# EAGLE board nixie (EAGLE 6.4)
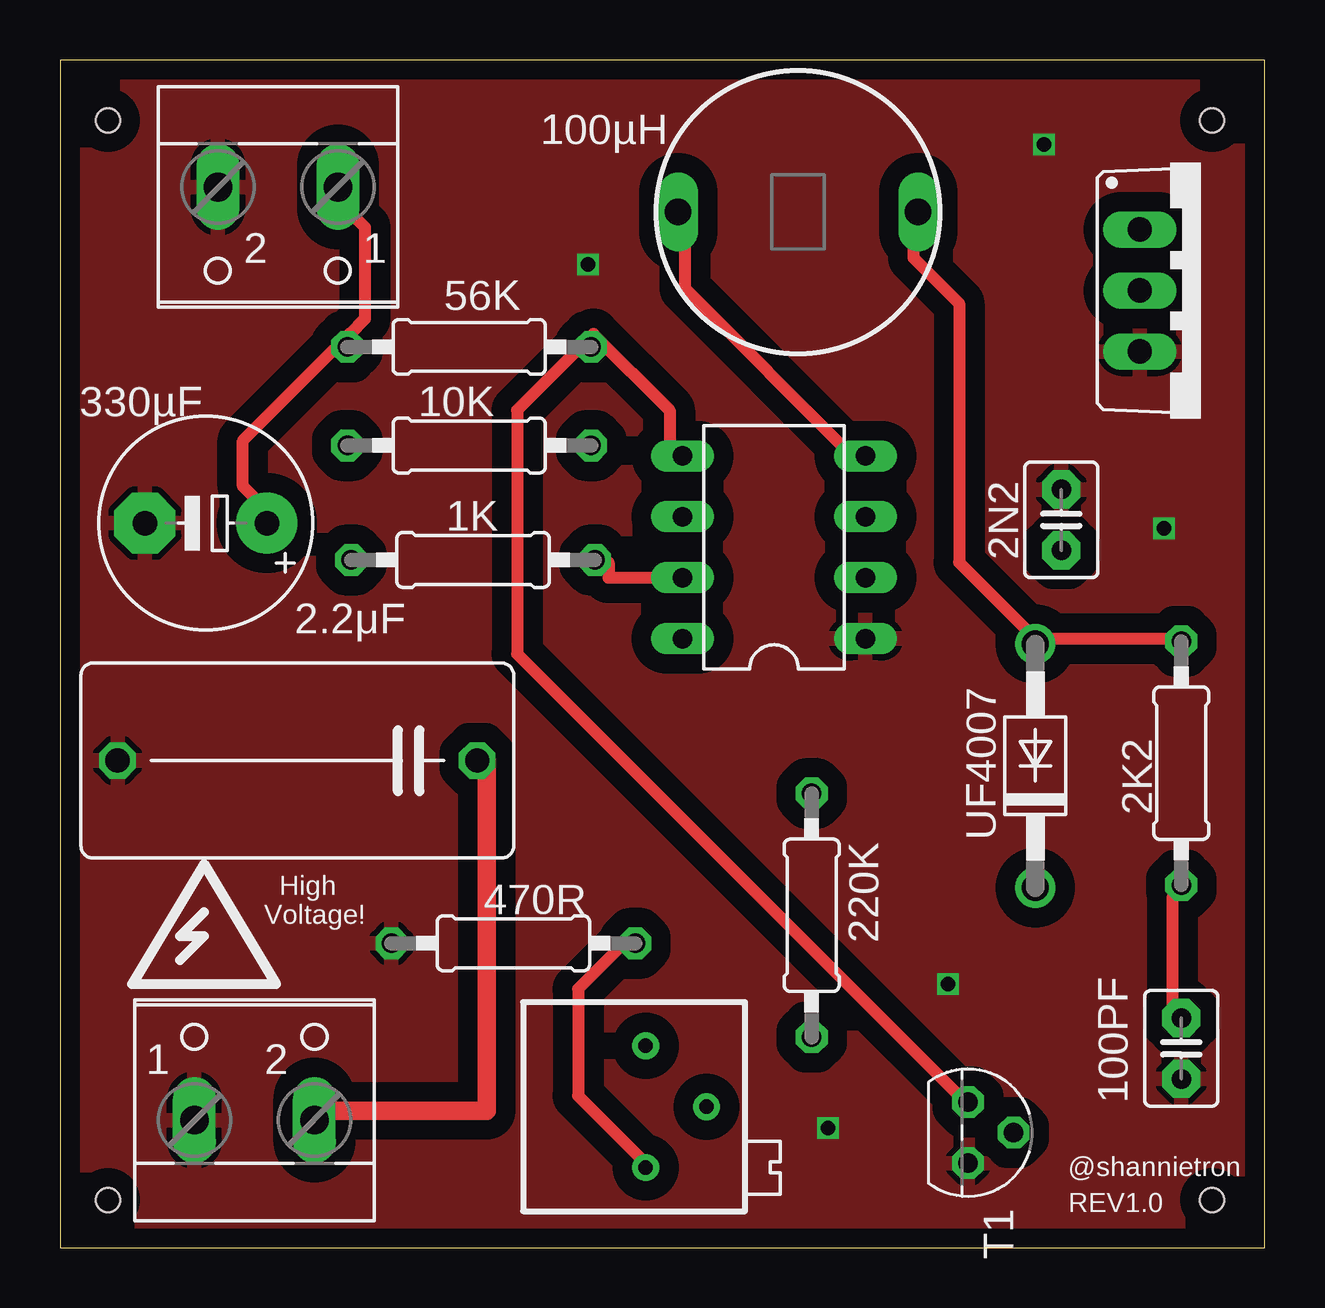
[diagram p0: board, top side]
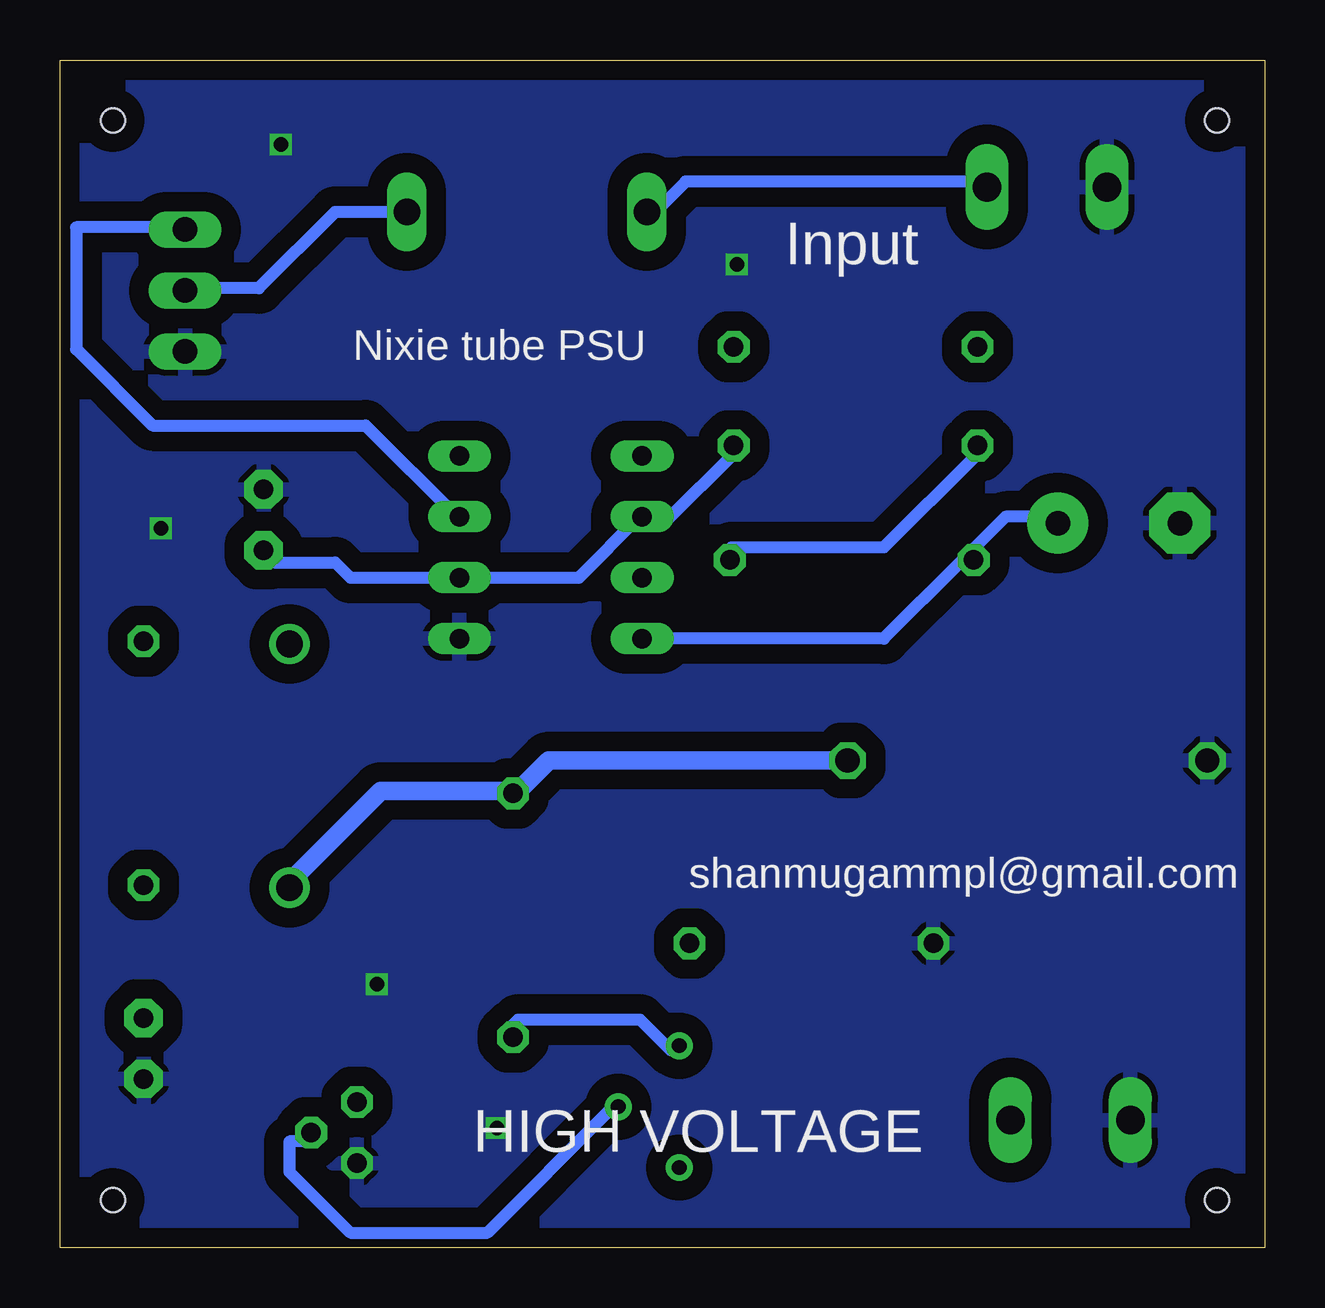
[diagram p1: board, bottom side, seen from below]

Size 50.2 x 49.52 mm. Coordinates in mm from the lower left corner, seen from the top.
Outline: 0,0 50.2,0 50.2,49.52 0,49.52 0,0
Copper layers (1*16): Top 0.035mm / dielectric 1.5mm / Bottom 0.035mm
Design rules "Fusion_eagle_rule_v1.1": minimum track width 6mil, minimum drill 12mil, track to track 6mil, track to pad 6mil, pad to pad 6mil, via to via 6mil, smd to smd 0mil, copper to edge 10mil, drill to drill 10mil, minimum pad ring 10mil, minimum via ring 6mil, stop-mask expansion 2mil, vias tented up to drill 100mil, thermal gap 10mil
Net classes: 0 default: width 0.508 mm, drill 0.508 mm, clearance 0.254 mm; 1 HV: width 0.762 mm, drill 0.635 mm, clearance 2.032 mm; 2 L: width 0.508 mm, drill 0.635 mm, clearance 1.016 mm
Holes 1 mm at 2,47 2,2 48,2 48,47

## Footprints (pad centres in the part's own frame; a part is rotated, then mirrored left to right if it is on the bottom)
0207/10 = drill 0.813 octagon: 1 -5.08,0; 2 5.08,0
C150-084X183 = drill 1.016 octagon: 1 -7.493,0; 2 7.493,0
C2.5-3 = drill 0.813 pad 1.6 octagon: 1 -1.27,0; 2 1.27,0
E5-8,5 = drill 1.016 pad 2.54: + -2.54,0 | drill 1.016 pad 2.54 octagon: - 2.54,0
DO41-10 = drill 1.118: A 5.08,0; C -5.08,0
DIL-08 = drill 0.813 long: 1 -3.81,-3.81; 2 -1.27,-3.81; 3 1.27,-3.81; 4 3.81,-3.81; 5 3.81,3.81; 6 1.27,3.81; 7 -1.27,3.81; 8 -3.81,3.81
SD12-680 = drill 1.1 long: 1 -5,0; 2 5,0
TO220BV = drill 1.016 long: D 0,-2.54; G -2.54,-2.54; S 2.54,-2.54
RTRIM3296P = drill 0.61: 1 0,-2.54; 2 2.54,0; 3 0,2.54
TO92 = drill 0.813 octagon: 1 1.27,0; 2 0,1.905; 3 -1.27,0
W237-102 = drill 1.194 long: 1 -2.5,-1.27; 2 2.5,-1.27

## Placement (x,y rotation side)
1K  [0207/10]  17.21,28.68 180 top
2.2μF  [C150-084X183]  9.89,20.32 180 top
2K2  [0207/10]  46.72,20.21 270 top
2N2  [C2.5-3]  41.72,30.35 90 top
10K  [0207/10]  17.05,33.45 180 top
56K  [0207/10]  17.05,37.56 0 top
100PF  [C2.5-3]  46.72,8.32 270 top
220K  [0207/10]  31.32,13.87 270 top
330µF  [E5-8,5]  6.08,30.21 180 top
470R  [0207/10]  18.89,12.7 180 top
D1  1N4004  [DO41-10]  40.64,20.1 90 top
IC1  NE555  [DIL-08]  29.75,29.21 90 top
L1  [SD12-680]  30.75,43.18 0 top
Q1  IRF740  [TO220BV]  47.53,39.91 270 top
R1  [RTRIM3296P]  24.4,5.89 0 top
T1  BC547  [TO92]  37.83,4.81 270 top
X1  [W237-102]  8.1,6.6 0 top
X2  [W237-102]  9.08,42.95 180 top

## Library data of the parts
1K 2K2 10K 56K 220K 330µF 470R = rcl
2.2μF R1 = resistor
2N2 100PF = capacitor-wima
D1 = diode
IC1 = st-microelectronics; MF: Arrow Electronics; MPN: NE555N; OC_FARNELL: 1467742; OC_NEWARK: 89K1486
L1 = inductor-neosid; MF: BUSSMANN; MPN: SD12-680; OC_FARNELL: unknown; OC_NEWARK: 19K7201
Q1 = transistor-power
T1 = transistor
X1 X2 = con-wago-500; MPN: 237-102; OC_FARNELL: unknown; OC_NEWARK: 70K9898

## Nets
GND: 2.2μF.2 2N2.2 100PF.2 330µF.- 470R.2 IC1.1 Q1.S T1.1 X1.1 X2.2
HV [HV]: 2.2μF.1 220K.1 D1.C X1.2
N$1: 1K.1 10K.2 IC1.7
N$2: 2N2.1 10K.1 IC1.2 IC1.6
N$4: 56K.2 IC1.5 T1.3
N$5: IC1.3 Q1.G
N$6 [L]: 2K2.1 D1.A L1.2 Q1.D
N$7: 2K2.2 100PF.1
N$8: 220K.2 R1.3
N$9: 470R.1 R1.1
N$10: R1.2 T1.2
VCC: 1K.2 56K.1 330µF.+ IC1.4 IC1.8 L1.1 X2.1

## Tracks (layer width: path | path; a pad name or v marks a point on that pad's centre or on a via)
GND  (via drill 0.6)
  other vias: 37,11 22,41 41,46 32,5 46,30
  pour Bottom (isolate 0.813): 0,50 0,0 50,0 50,50
  pour Top (isolate 0.813): 0,50 0,0 50,0 50,50
HV
  Top 0.762: X1.2 10.79,5.71 17.78,5.71 17.78,20.32 2.2μF.1
  Bottom 0.762: 2.2μF.1 29.84,20.32 31.11,19.05 220K.1 31.75,19.05 36.83,19.05 40.64,15.24 D1.C
N$1
  Top 0.508: IC1.7 22.86,27.94 22.86,28.57 1K.1
  Bottom 0.508: 10K.2 12.06,33.02 15.88,29.21 22.23,29.21 1K.1
N$2
  Bottom 0.508: 10K.1 22.23,33.02 24.77,30.48 IC1.6 26.04,30.48 28.57,27.94 IC1.2 38.1,27.94 38.73,28.57 41.27,28.57 2N2.1
N$4
  Top 0.508: T1.3 37.47,6.35 19.05,24.77 19.05,34.92 21.59,37.47 56K.2 22.23,38.1 25.4,34.92 25.4,33.02 IC1.5
N$5
  Bottom 0.508: IC1.3 33.66,30.48 37.47,34.29 46.35,34.29 49.53,37.47 49.53,42.55 45.09,42.55 Q1.G
N$6
  Top 0.508: 40.64,25.4 46.35,25.4 2K2.1 | 40.64,25.4 37.47,28.57 37.47,39.37 35.56,41.27 35.56,43.18 L1.2 | 40.64,25.4 D1.A
  Bottom 0.508: L1.2 38.73,43.18 41.91,40.01 44.45,40.01 Q1.D
N$7
  Top 0.508: 2K2.2 46.35,14.61 46.35,10.16 100PF.1
N$8
  Bottom 0.508: R1.3 24.77,8.26 26.04,9.53 31.11,9.53 31.75,8.89 220K.2
N$9
  Top 0.508: R1.1 24.13,3.81 21.59,6.35 21.59,10.79 23.5,12.7 470R.1
N$10
  Bottom 0.508: R1.2 27.3,5.71 32.38,0.64 38.1,0.64 40.64,3.17 40.64,4.45 40.01,4.45 T1.2
VCC
  Top 0.508: IC1.4 33.02,33.02 26.04,40.01 26.04,43.18 L1.1 | X2.1 12.06,43.81 12.06,43.18 12.7,42.55 12.7,38.73 12.06,38.1 56K.1 11.43,37.47 7.62,33.66 7.62,31.75 8.26,31.11 8.26,30.48 330µF.+
  Bottom 0.508: 330µF.+ 8.89,30.48 10.79,30.48 12.06,29.21 1K.2 12.7,28.57 15.88,25.4 IC1.8 | L1.1 25.4,43.18 24.13,44.45 12.06,44.45 X2.1

## Text on the board
tPlace: 100µH | UF4007 | High / Voltage! | @shannietron | REV1.0
bPlace: Input | Nixie tube PSU | shanmugammpl@gmail.com | HIGH VOLTAGE